# EAGLE board Project (EAGLE 7.6.0)

Size 56.82 x 53.33 mm. Coordinates in mm from the lower left corner, seen from the top.
Outline: 0,0 56.82,0 56.82,53.33 0,53.33 0,0
Copper layers (1*16): Top 0.035mm / dielectric 1.5mm / Bottom 0.035mm
Design rules "default": minimum track width 10mil, minimum drill 24mil, track to track 8mil, track to pad 8mil, pad to pad 8mil, via to via 8mil, smd to smd 8mil, copper to edge 40mil, drill to drill 8mil, minimum pad ring 10mil, minimum via ring 8mil, stop-mask expansion 4mil, vias tented up to drill 0mil, thermal gap 10mil

## Footprints (pad centres in the part's own frame; a part is rotated, then mirrored left to right if it is on the bottom)
LED5MM = drill 0.813 octagon: A -1.27,0; K 1.27,0
2P-2.54-65/35MIL = drill 0.889 pad 1.651 square: 1 0,1.27 | drill 0.889 pad 1.651: 2 0,-1.27
PIEZO-22MM = drill 1 pad 2.54: P$1 -5,0; P$2 5,0
0207/10 = drill 0.813 octagon: 1 -5.08,0; 2 5.08,0
DIP04YL = drill 0.813 long: 1 -3.81,-3.81; 2 -1.27,-3.81; 3 1.27,-3.81; 4 3.81,-3.81; 5 3.81,3.81; 6 1.27,3.81; 7 -1.27,3.81; 8 -3.81,3.81
DIL14 = drill 0.813 long: 1 -7.62,-3.81; 2 -5.08,-3.81; 3 -2.54,-3.81; 4 0,-3.81; 5 2.54,-3.81; 6 5.08,-3.81; 7 7.62,-3.81; 8 7.62,3.81; 9 5.08,3.81; 10 2.54,3.81; 11 0,3.81; 12 -2.54,3.81; 13 -5.08,3.81; 14 -7.62,3.81

## Placement (x,y rotation side)
D1  [LED5MM]  5,124.38 0 top  (outside the outline)
D2  [LED5MM]  5,137.08 0 top  (outside the outline)
D3  [LED5MM]  5,149.78 0 top  (outside the outline)
D4  [LED5MM]  5,264.08 0 top  (outside the outline)
D5  [LED5MM]  5,276.78 0 top  (outside the outline)
D6  [LED5MM]  5,289.48 0 top  (outside the outline)
D7  [LED5MM]  5,302.18 0 top  (outside the outline)
D8  [LED5MM]  5,314.88 0 top  (outside the outline)
L1  [2P-2.54-65/35MIL]  5,416.48 0 top  (outside the outline)
P1  5V  [2P-2.54-65/35MIL]  5,60.88 0 top  (outside the outline)
PIEZO1  [PIEZO-22MM]  5,454.58 0 top  (outside the outline)
R1  1k‎Ω  [0207/10]  5,73.58 0 top  (outside the outline)
R2  1k‎Ω  [0207/10]  5,86.28 0 top  (outside the outline)
R3  1k‎Ω  [0207/10]  5,98.98 0 top  (outside the outline)
R4  1k‎Ω  [0207/10]  5,162.48 0 top  (outside the outline)
R5  1k‎Ω  [0207/10]  5,175.18 0 top  (outside the outline)
R6  1k‎Ω  [0207/10]  5,187.88 0 top  (outside the outline)
R7  1k‎Ω  [0207/10]  5,200.58 0 top  (outside the outline)
R8  1k‎Ω  [0207/10]  5,213.28 0 top  (outside the outline)
R9  1k‎Ω  [0207/10]  5,225.98 0 top  (outside the outline)
R10  1k‎Ω  [0207/10]  5,238.68 0 top  (outside the outline)
R11  1k‎Ω  [0207/10]  5,251.38 0 top  (outside the outline)
R12  1k‎Ω  [0207/10]  5,378.38 0 top  (outside the outline)
R13  1k‎Ω  [0207/10]  5,391.08 0 top  (outside the outline)
R14  1k‎Ω  [0207/10]  5,429.18 0 top  (outside the outline)
R15  1k‎Ω  [0207/10]  5,441.88 0 top  (outside the outline)
SW1  [DIP04YL]  5,10.08 0 top
SW2  [DIP04YL]  5,340.28 0 top  (outside the outline)
U1  [DIL14]  5,22.78 0 top
U2  [DIL14]  5,35.48 0 top
U3  [DIL14]  5,48.18 0 top
U4  [DIL14]  5,111.68 0 top  (outside the outline)
U5  [DIL14]  5,327.58 0 top  (outside the outline)
U6  [DIL14]  5,352.98 0 top  (outside the outline)
U7  [DIL14]  5,365.68 0 top  (outside the outline)
U8  [DIL14]  5,403.78 0 top  (outside the outline)

## Library data of the parts
D1-D8 L1 P1 PIEZO1 R1-R15 SW1 SW2 U1-U8 = AUTODESK_CIRCUITS_BREADBOARD

## Nets
N$1: U1.8
N$2: U1.12 U2.11 U2.13 U3.5 U4.13
N$3: U1.2 U2.1 U2.3 U2.9 U3.1
N$4: U1.3
N$5: U1.6 U2.2 U2.4 U3.4 U3.10
N$6: U1.9
N$7: U1.4
N$8: U1.10
N$9: U1.11
N$10: R1.1 SW1.8 U1.1 U3.3 U3.9 U4.1 U4.3
N$11: R2.1 SW1.7 U1.5 U2.10 U3.2 U4.2 U4.4
N$12: R3.1 SW1.6 U1.13 U2.5 U3.11 U3.13 U4.5
N$13: D3.A U2.6 U5.9
N$14: D1.A U2.12
N$15: D4.A U2.8 U5.10
N$16: D6.A U3.6 U5.13
N$17: D5.A U3.12 U5.12
N$18: D7.A U3.8 U5.5
N$19: P1.2 R1.2 R2.2 R3.2 R12.2 U1.14 U2.14 U3.14 U4.14 U5.14 U6.14 U7.14 U8.14
N$20: U4.11
N$21: D2.A U4.6 U5.1
N$22: D8.A U4.12 U5.2
N$23: U4.9
N$24: U4.8
N$25: U4.10
N$26: D1.K R5.2
N$27: D3.K R7.2
N$28: D4.K R11.2
N$29: D5.K R10.2
N$30: D6.K R8.2
N$31: D7.K R9.2
N$32: D8.K R6.2
N$33: D2.K R4.2
N$34: U5.3 U5.4
N$35: U5.11 U6.13
N$36: U5.6 U7.13
N$37: U5.8 U6.12
N$38: L1.2 U6.3
N$39: U6.11 U7.1
N$40: PIEZO1.P$1 U6.6
N$41: U6.8
N$42: U6.9
N$43: U6.10
N$44: U6.4 U7.3
N$45: U6.1 U7.11
N$46: U6.5 U7.6
N$47: U6.2 U7.8
N$48: R12.1 SW2.8 U7.2 U7.12 U8.9
N$49: U8.13
N$50: U8.12
N$51: U8.2
N$52: U8.5
N$53: U8.1
N$54: U8.3
N$55: U8.6
N$56: U8.4
N$57: P1.1 R4.1 R5.1 R6.1 R7.1 R8.1 R9.1 R10.1 R11.1 R13.2 R14.1 R15.1 SW1.1 SW1.2 SW1.3 SW2.1 U1.7 U2.7 U3.7 U4.7 U5.7 U6.7 U7.7 U8.7
N$58: U8.10
N$59: U8.11
N$60: L1.1 R15.2
N$61: R13.1 U7.5 U7.9
N$62: U7.4 U7.10 U8.8
N$63: PIEZO1.P$2 R14.2

## Tracks (layer width: path | path; a pad name or v marks a point on that pad's centre or on a via)
N$2  (4 unrouted)
N$3  (4 unrouted)
N$5  (4 unrouted)
N$10  (6 unrouted)
N$11  (6 unrouted)
N$12  (6 unrouted)
N$13  (2 unrouted)
N$14  (1 unrouted)
N$15  (2 unrouted)
N$16  (2 unrouted)
N$17  (2 unrouted)
N$18  (2 unrouted)
N$19  (12 unrouted)
N$21  (2 unrouted)
N$22  (2 unrouted)
N$26  (1 unrouted)
N$27  (1 unrouted)
N$28  (1 unrouted)
N$29  (1 unrouted)
N$30  (1 unrouted)
N$31  (1 unrouted)
N$32  (1 unrouted)
N$33  (1 unrouted)
N$34  (1 unrouted)
N$35  (1 unrouted)
N$36  (1 unrouted)
N$37  (1 unrouted)
N$38  (1 unrouted)
N$39  (1 unrouted)
N$40  (1 unrouted)
N$44  (1 unrouted)
N$45  (1 unrouted)
N$46  (1 unrouted)
N$47  (1 unrouted)
N$48  (4 unrouted)
N$57  (23 unrouted)
N$60  (1 unrouted)
N$61  (2 unrouted)
N$62  (2 unrouted)
N$63  (1 unrouted)